# Altium PCB PCB2.PcbDoc
Units mil, origin at the board's own origin, x right, y up, seen from the top; angles counter-clockwise.
Board outline 1565.03 x 1105.03 mil, 2 copper layers (Top Layer, Bottom Layer); 8 components, 4 nets, 21 pads, 0 vias.
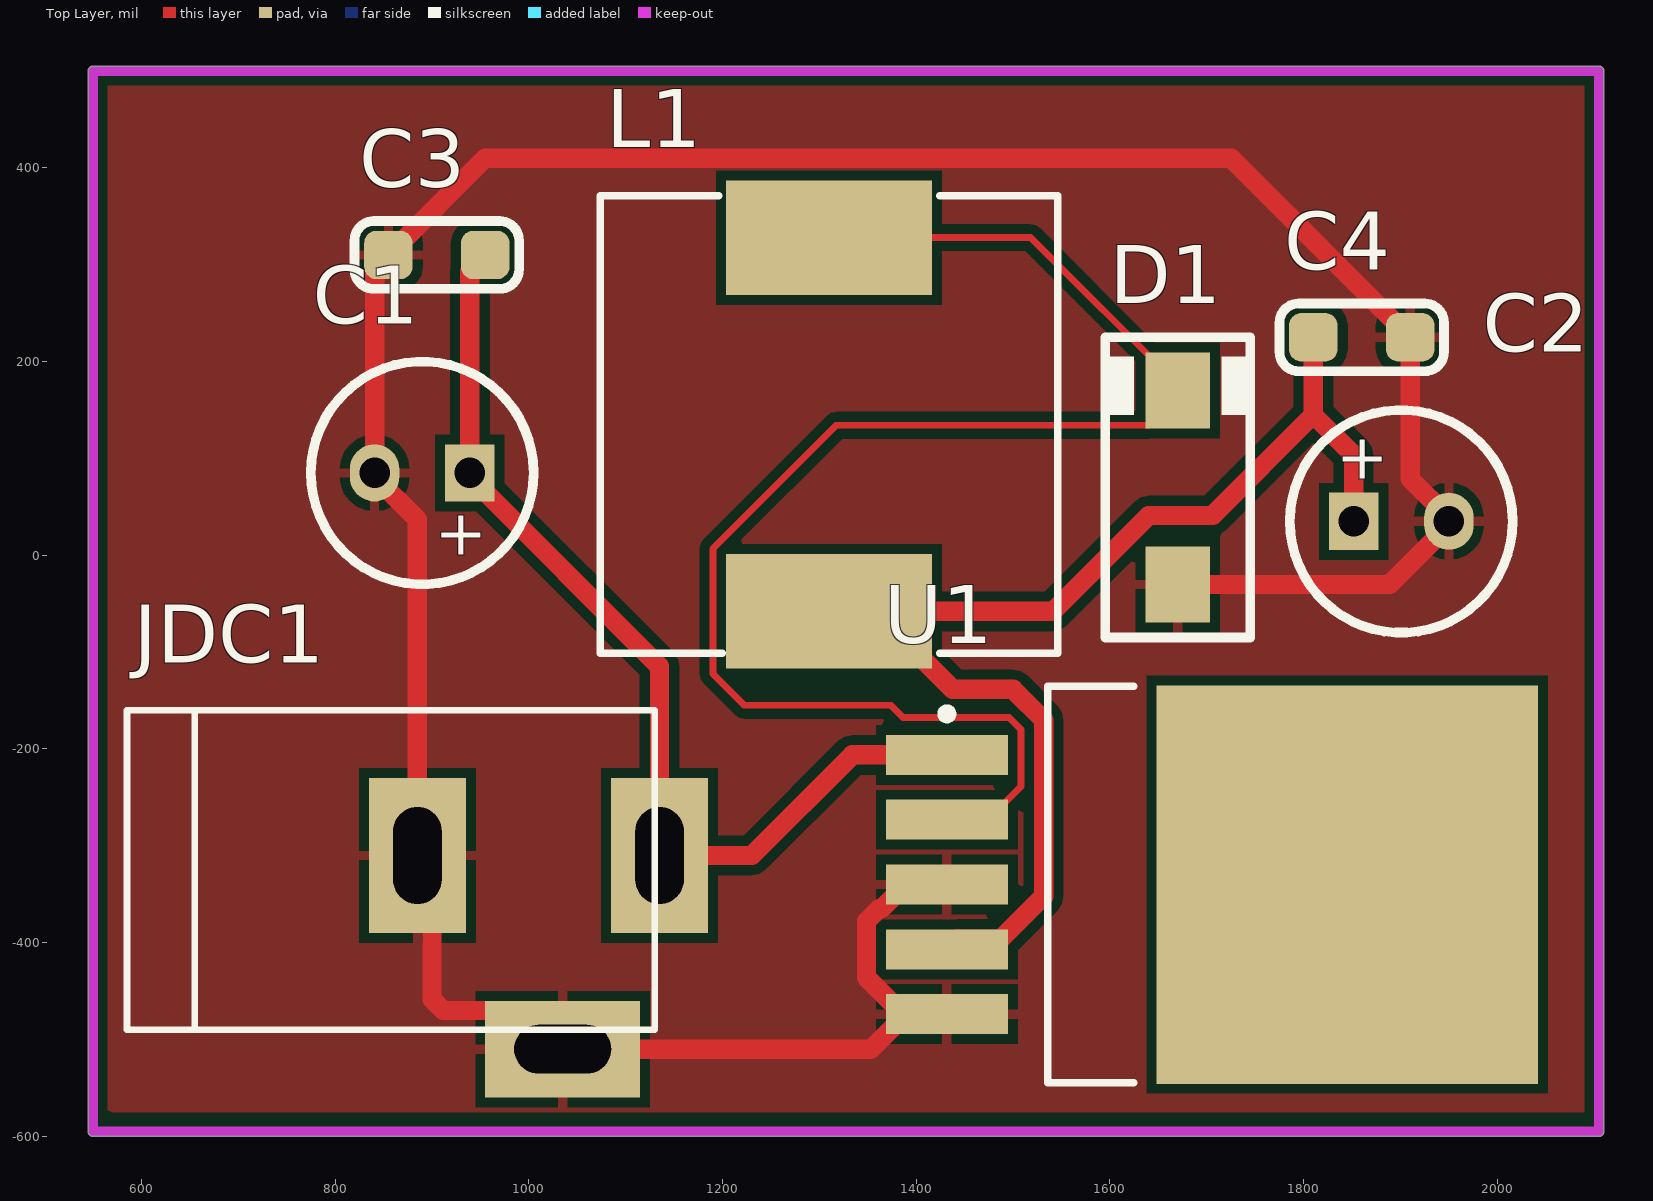
[diagram p0: Top Layer view]
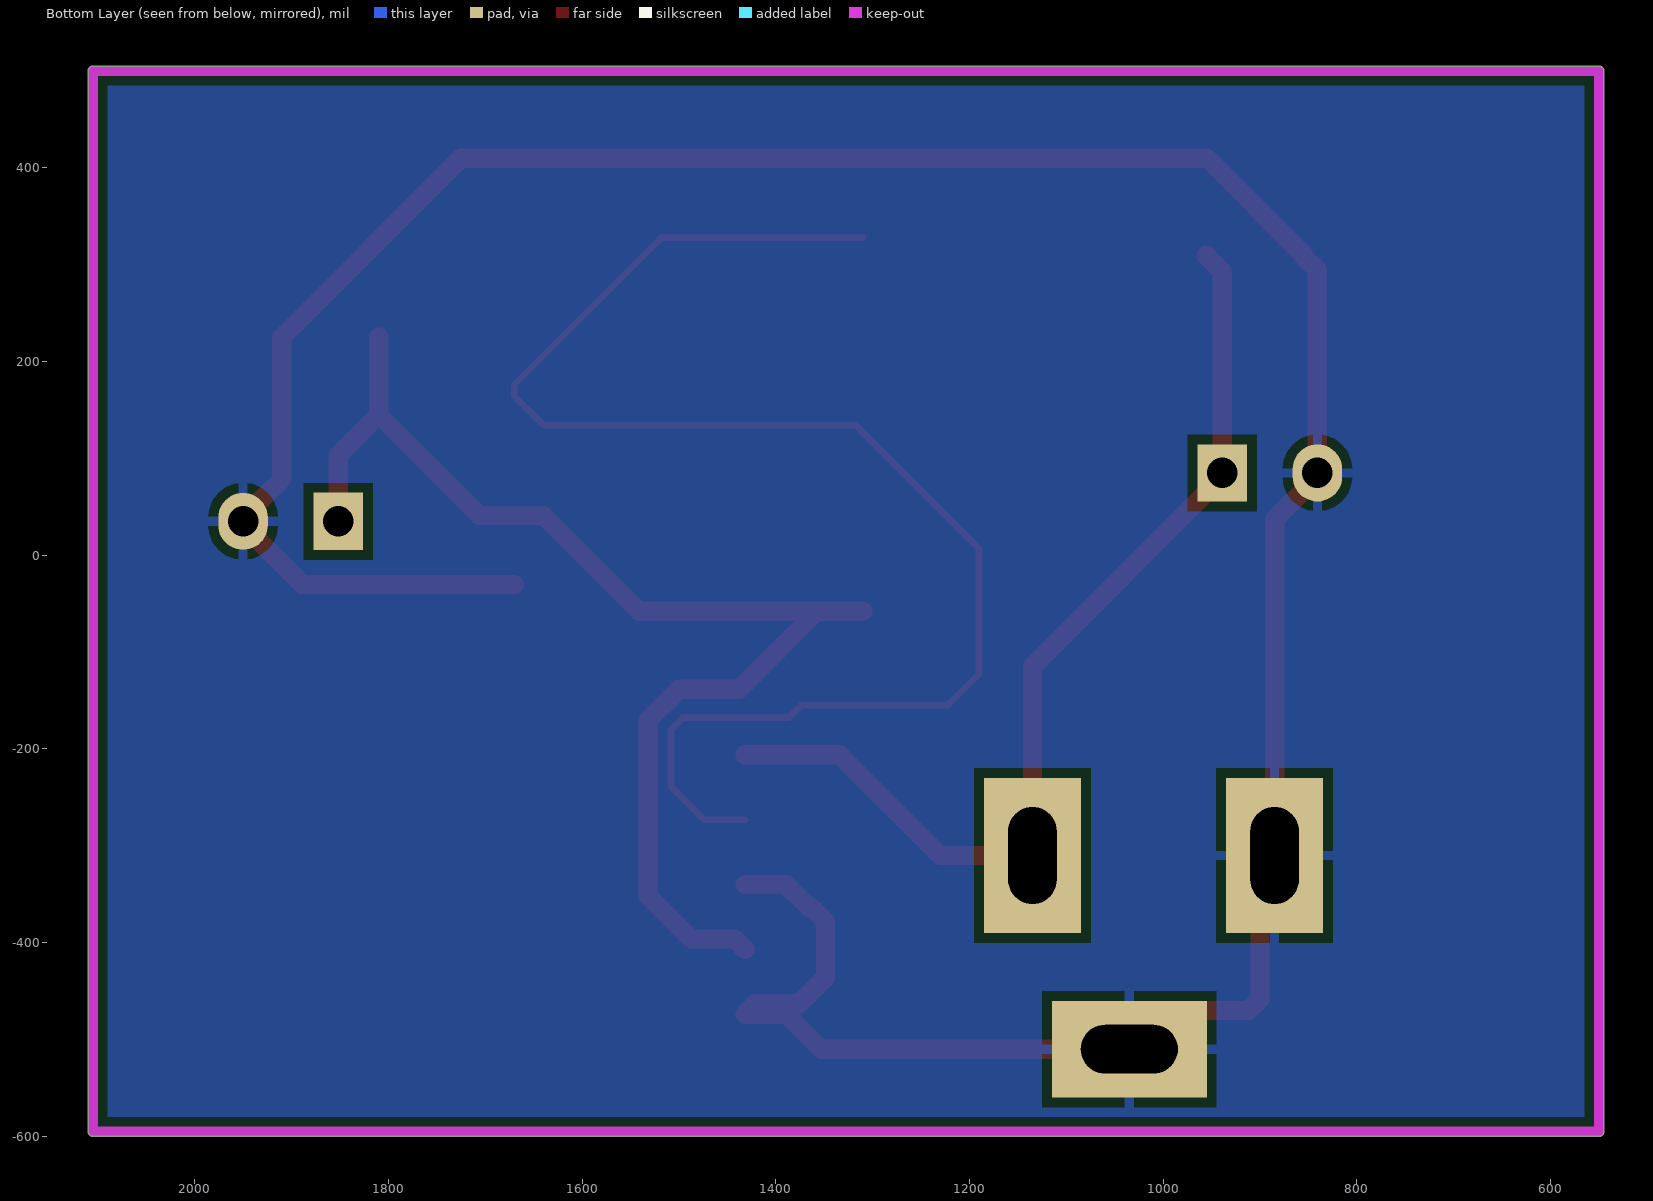
[diagram p1: Bottom Layer view, seen from below]
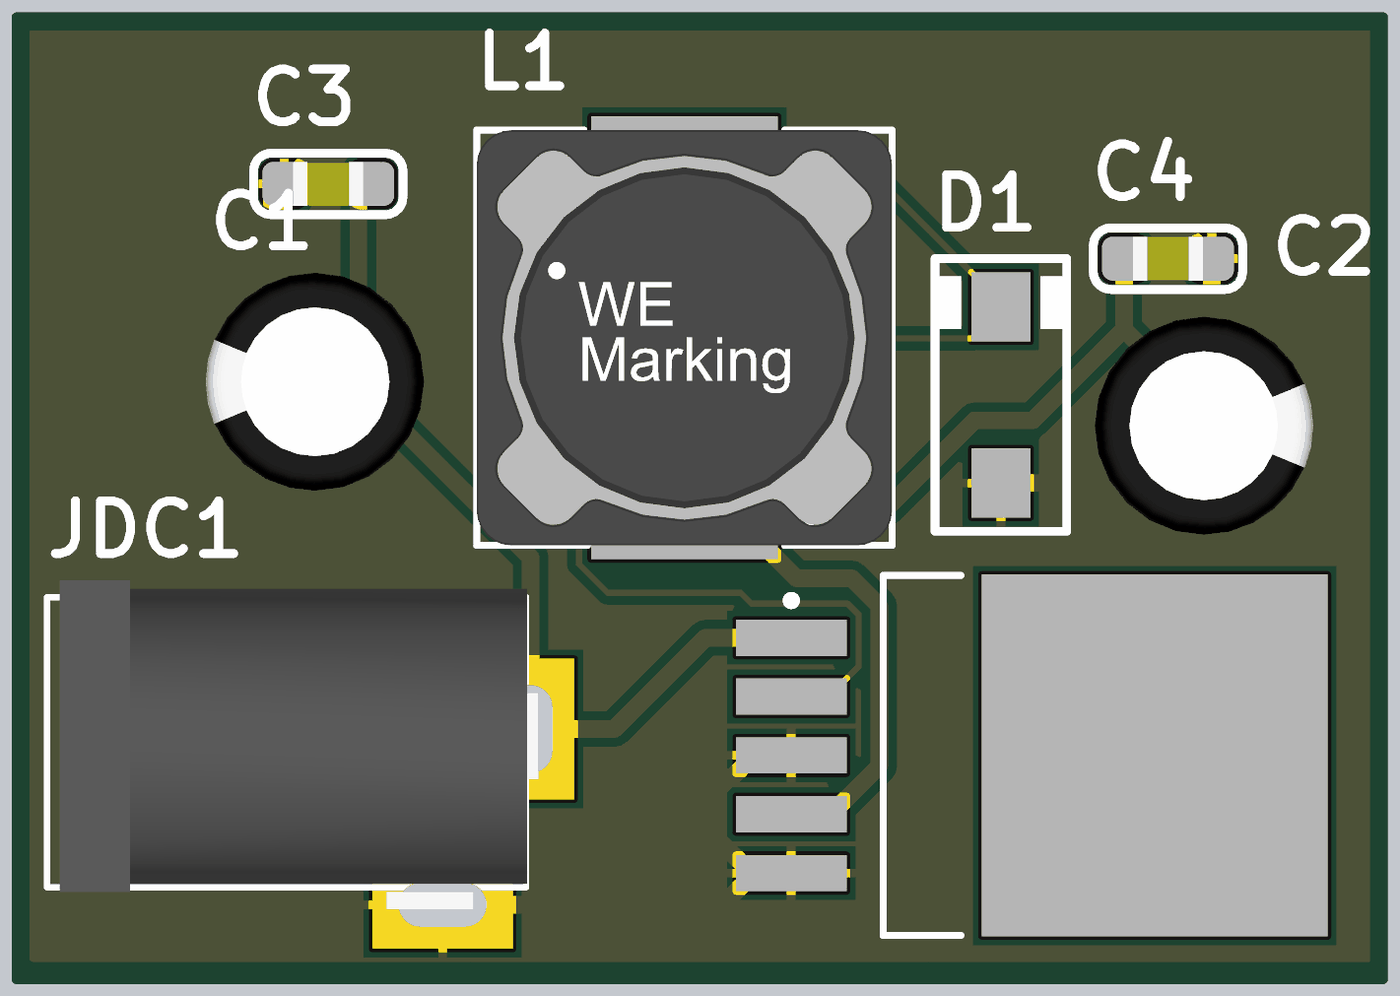
[diagram p2: 3D render of the assembled board from above, using the file's embedded part models]

## Layer stack, top to bottom
Top Solder: solder mask 0.4, Solder Resist, Dk 3.5
Top Layer: signal copper 1.4
Dielectric 1: dielectric 12.6, FR-4, Dk 4.8
Bottom Layer: signal copper 1.4
Bottom Solder: solder mask 0.4, Solder Resist, Dk 3.5

## Board outline
550,-600.01 cw(c550,-595) 544.98,-595 544.98,500 cw(c550,500) 550,505.01 2105,505.01 cw(c2105,500) 2110.01,500 2110.01,-595 cw(c2105,-595) 2105,-600.01

## Design rules (kind name [scope] priority, off if disabled: settings)
Clearance [All] p1: gap=10 ignorepadtopadclearanceinfootprint=FALSE except(0: Arc-Hole Track-Hole SMDPad-Hole THPad-Hole Via-Hole Fill-Hole Poly-Hole Region-Hole Text-Hole)
PolygonConnect [All] p1: connectstyle=Relief reliefconductorwidth=10 reliefentries=4 polygonreliefangle="90 Angle" airgapwidth=10
RoutingVias [All] p1: holewidth=28 width=50 viastyle="Through Hole" minholewidth=28 minwidth=50 maxholewidth=28 maxwidth=50
SolderMaskExpansion [All] p1: expansion=4 istentingtop=FALSE
Width [All] p1: maxlimit=20 minlimit=7 preferedwidth=15 bottomlayer_minwidth=10 bottomlayer_maxwidth=10 bottomlayer_prefwidth=10 minimp=50.000000 maximp=50.000000 favimp=50.000000
30 further rules are at their usual default settings.

## Classes and differential pairs
component class Sheet2: C1 C3 JDC1 L1 U1

## Components (designator, comment, footprint, x,y, rotation, side; value= is the part's Value field where it differs from the comment)
C1 "470uf, 16V" C8mm 890,85 r180 top
C2 "470uf, 16V" C8mm 1900.79,35 r0 top
C3 "104" CAP_0805 905,310 r0 top value=33p
C4 "104" CAP_0805 1860,225 r180 top value=33p
D1 "1N5822" SMA 1670,70 r90 top value="Diode c?m 1N5408"
JDC1 "Jac DC" DC-IN 1010,-410 r0 top
L1 "47uH, CD127" L-SMD-M-12x10 1310,135 r0 top value="150 mH"
U1 "LM2976-5V" TO-263 1667.83,-340 r0 top

## Footprints (in the part's own frame and the unit in brackets; to place one, negate y for a bottom-side part, rotate by r counter-clockwise, add the part's x,y. Pads: shape width x height; smd on the part's side, far side on the other; paste and mask are expansions set on the pad)
C8mm [mm]
  rect 1.3x1.5 hole 0.8: 1(-1.25,0)
  oval 1.3x1.5 hole 0.8: 2(1.25,0)
  silkscreen extent -2.92,-2.92 2.92,2.92, body extent -3.15,-3.15 3.13,3.15, height 11.51
CAP_0805 [mil]
  rrect50% 50x50 smd: 1(-50,0) 2(50,0)
  silkscreen extent -85,-35 85,35, body extent -40,-25 40,25, height 24
DC-IN [mil] "Jac DC input"
  rect 100x160 hole 50 slot 100 at 90 deg: 1(125,100) 2(-125,100)
  rect 160x100 hole 50 slot 100 at 0 deg: 3(25,-100)
  silkscreen extent -425,-80 120,250, body extent -410,-105 134,269, height 434
L-SMD-M-12x10 [mm] "WE-PDA SMD Shielded Power Inductor, 1210"
  rect 5.4x3 smd: 1(0,4.9) 2(0,-4.9)
  silkscreen extent -6,-6 6,6, body extent -6,-6 6,6, height 9.7
SMA [mm]
  rect 2x1.7 smd: 1(-2.544,0) 2(2.544,0)
  silkscreen extent -3.94,-1.9 3.94,1.91, body extent -2.87,-1.4 2.87,1.4, height 2.29
TO-263 [mm]
  rect 3.2x1.05 smd: 1(-6,3.4) 2(-6,1.7) 3(-6,0) 4(-6,-1.7) 5(-6,-3.4)
  rect 10x10.45 smd: 6(4.5,0)
  silkscreen extent -6.12,-5.2 -1.1,5.2, body extent -6.58,-5.2 7.57,5.2, height 4.65

## Part data
C1 C2: library part "Cap Pol", "Polarized Capacitor (Axial)", LatestRevisionDate=17-Jul-2002, LatestRevisionNote="Re-released for DXP Platform.", PackageReference=POLAR0.8, Published=8-Jun-2000, Publisher="Altium Limited"
C3 C4: library part CapSMD, "Capacitor", LatestRevisionDate=17-Jul-2002, LatestRevisionNote="Re-released for DXP Platform.", PackageReference=RAD-0.3, Published=8-Jun-2000, Publisher="Altium Limited"
D1: "Schottky Rectifiers"
JDC1: library part DCIN, "Jac DC input"
L1: library part Inductor, "Inductor"
U1: library part LM2596, Max Input Voltage="12 V", Max Output Current="3 (6.0 peak) A", Max Output Voltage=mV, Temperature Range="-40 to +125 degC", Category=IC-Power, Min Input Voltage=mV, Min Output Voltage=mV, Mounting Technology="Surface Mount", Status=Unreleased, Supply Voltage=mV

## Nets (pads, with @x,y where several pads share a name; then routed paths per layer and width w, separated by ;. In a path a pad name is that pad's centre, name@x,y a point inside that pad or via, vN(x,y) a via of type N, cw(c..) or ccw(c..) an arc to the next point about the centre after c; other vN are vias at no path point)
5V: C2.1 C4.2 L1.2 U1.4 | length 1316.7
  Top Layer w20: L1.2 L1.2@1357.24,-57.91 ; U1.4 1442.28,-396.26 1487.3,-396.26 1531.61,-351.95 1531.61,-170.15 1500.02,-138.56 1437.89,-138.56 L1.2@1357.24,-57.91 ; C4.2 1810,145 ; C2.1 1851.57,103.43 1810,145 ; L1.2@1357.24,-57.91 1541.13,-57.91 1640.08,41.04 1706.04,41.04 1810,145
12V: C1.1 C3.2 JDC1.1 U1.1 | length 1047.3
  Top Layer w20: C3.2 955,308.65 939.21,292.86 C1.1 939.21,81.06 1135,-114.72 JDC1.1 1230.22,-310 1334.07,-206.14 U1.1
GND: C1.2 C2.2 C3.1 C4.1 D1.1 JDC1.2 JDC1.3 U1.3 U1.5 | length 3311
  Top Layer w20: U1.3 1389.29,-340 1364.48,-364.81 1361.79,-364.81 1348.62,-377.98 1348.62,-435.88 1375.93,-463.19 1420.94,-463.19 U1.5 1389.29,-473.86 1353.15,-510 JDC1.3 995,-470 911.72,-470 900,-458.28 900,-325 JDC1.2 885,36.85 840.79,81.06 C1.2 840.79,294.43 855,308.65 C3.1 955,410 1725,410 C4.1 1910,78.94 1950,38.94 C2.2 1950,31.06 1888.78,-30.16 D1.1
NetD1_2: D1.2 L1.1 U1.2 | length 1600.4
  Top Layer w7: L1.1 1518.15,327.91 1670,176.06 D1.2 1670,164.25 1640.04,134.29 1317.75,134.29 1190.2,6.73 1190.2,-122.56 1222.64,-155 1373.85,-155 1386.29,-167.44 1495.67,-167.44 1508.11,-179.88 1508.11,-238.9 1473.94,-273.07 U1.2
pads on no net: U1.6

## Polygon pours and split planes (outlines as drawn)
GND on Bottom Layer "GND_L02_P000" (solid, remove dead copper, pour order 0): 555,495 555,-595 2095,-595 2105,-585 2105,490 560,490
GND on Top Layer "GND_L01_P001" (solid, remove dead copper, pour order 1): 560,485 560,-585 570,-575 2095,-575 2095,490 2090,485

## Keep-outs
Keep-Out Layer:
  lines w10: 550,-595 2105,-595 2105,500 550,500 550,-595

## Text inside footprints (layer, text, board x,y; h text height)
C1: Top Overlay "+" at 957,41 h47.24 r180
C2: Top Overlay "+" at 1833.79,79 h47.24